# Altium PCB PCB1.PcbDoc (part 1 of 3)
Units mm, origin at the board's own origin, x right, y up, seen from the top; angles counter-clockwise.
Board outline 100 x 60 mm, 4 copper layers (Top Layer, GND, POWER, Bottom Layer), stack 1.592 mm thick; 134 components, 201 nets, 911 pads, 539 vias.
Unrouted connection lines stored in the file: 3.
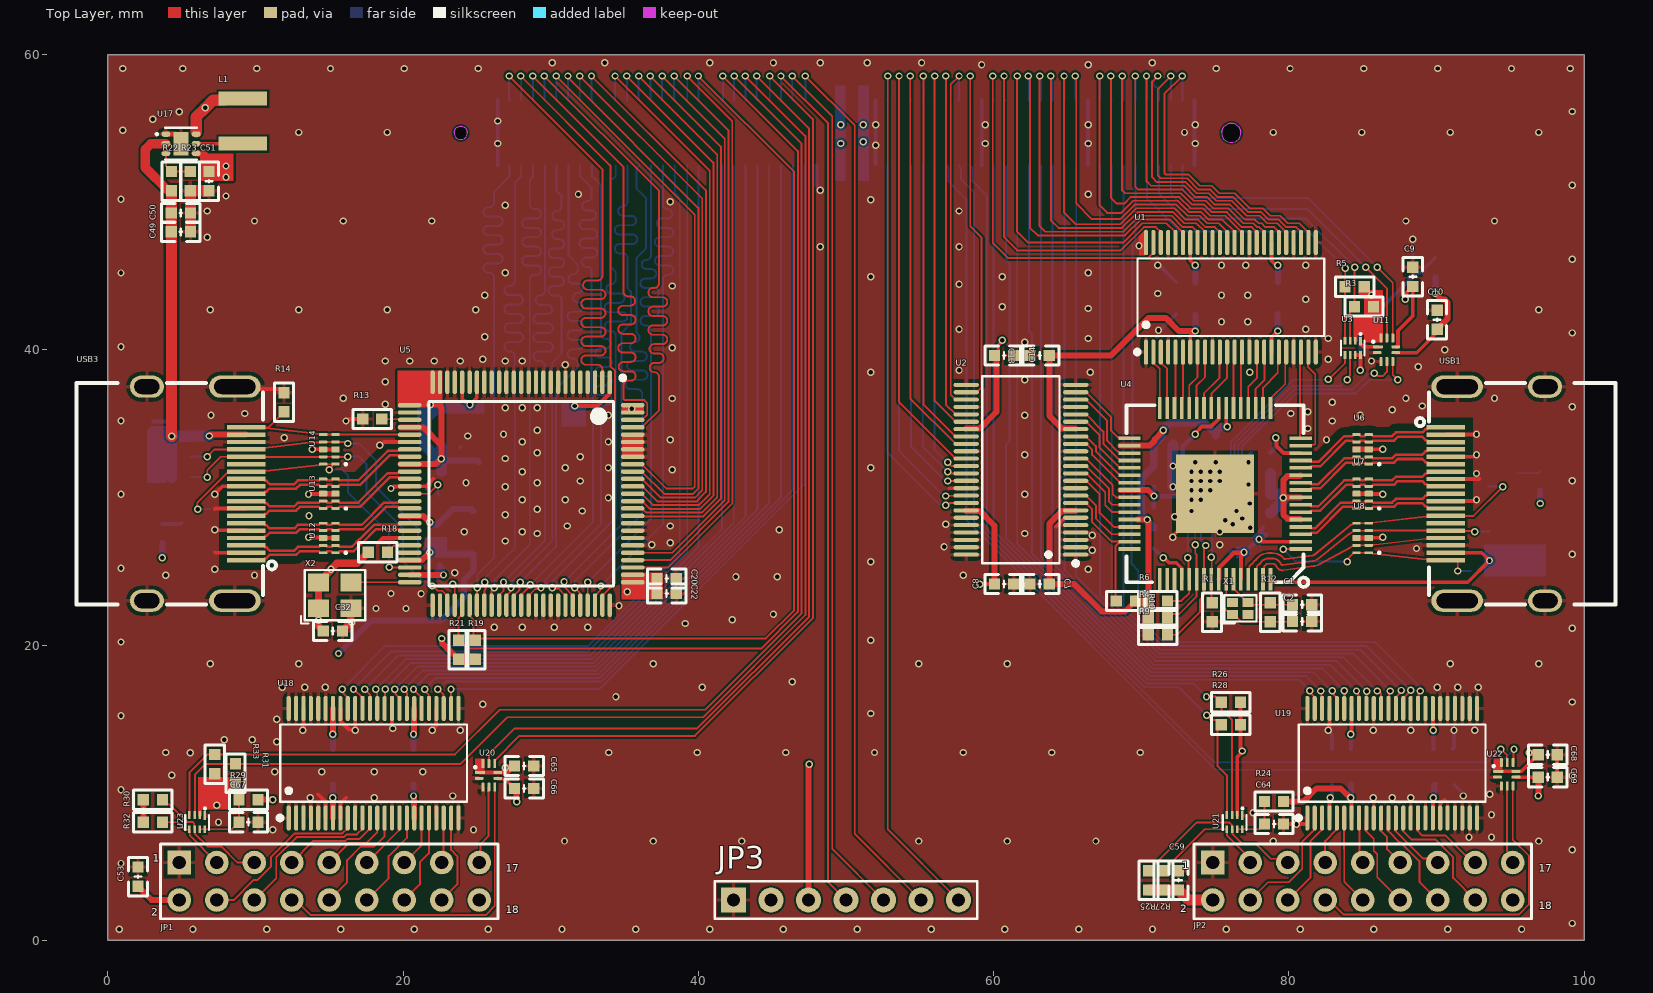
[diagram p0: Top Layer view]
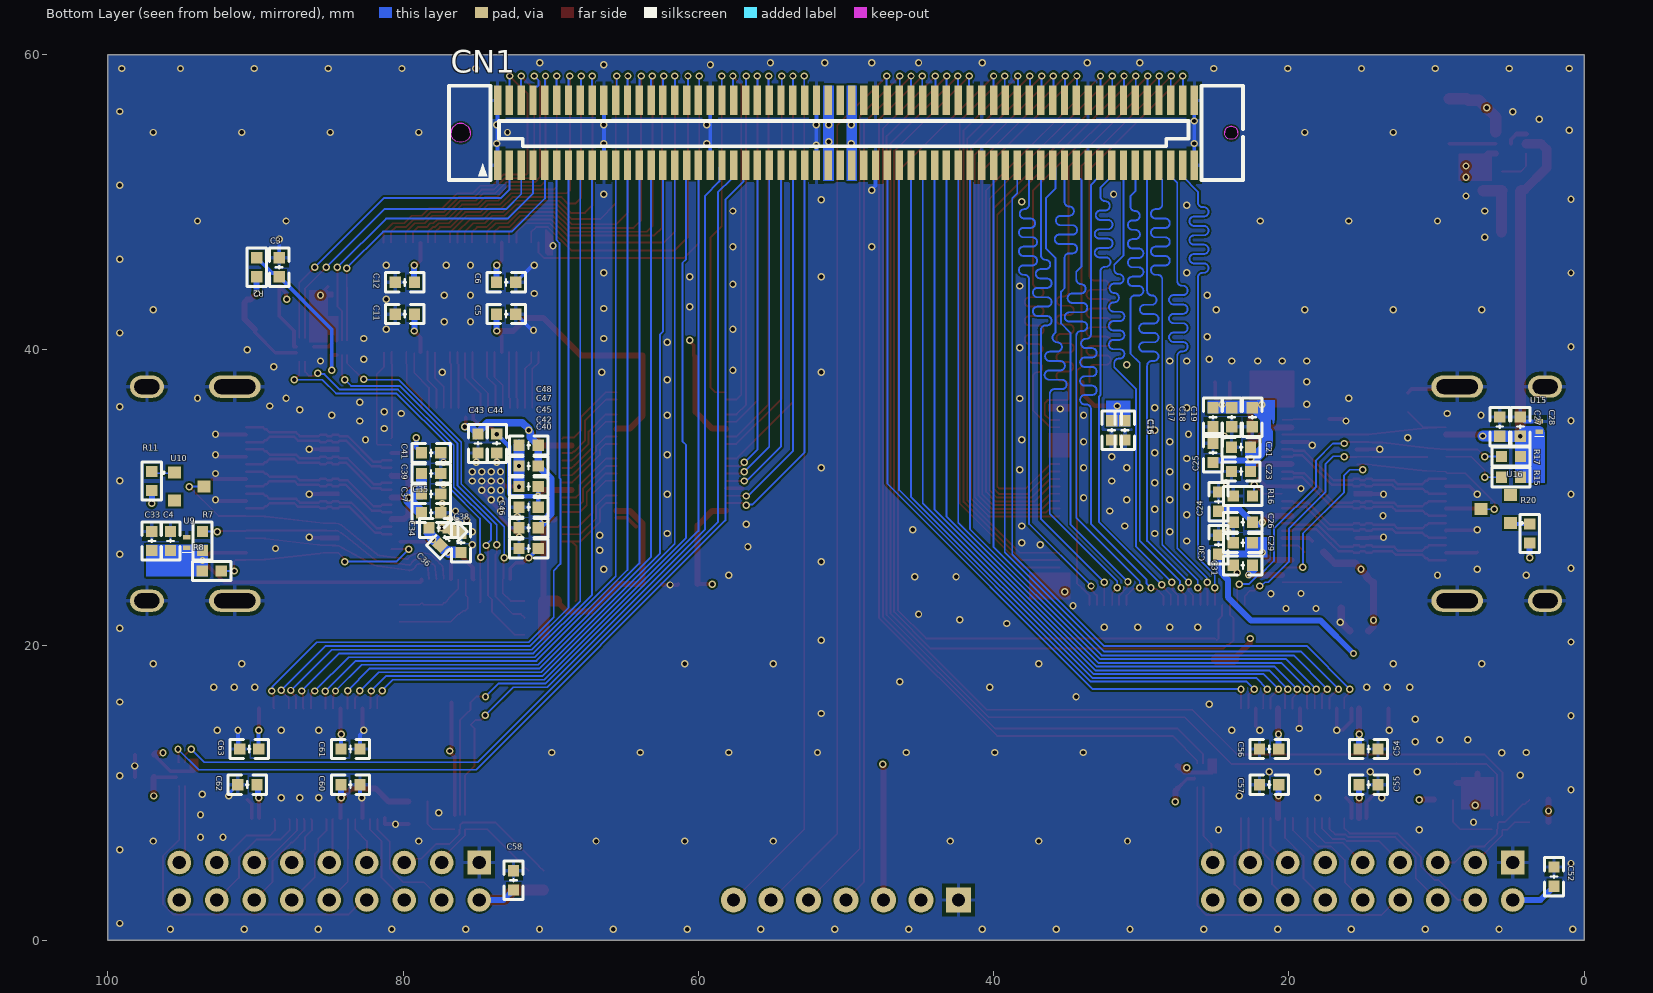
[diagram p1: Bottom Layer view, seen from below]
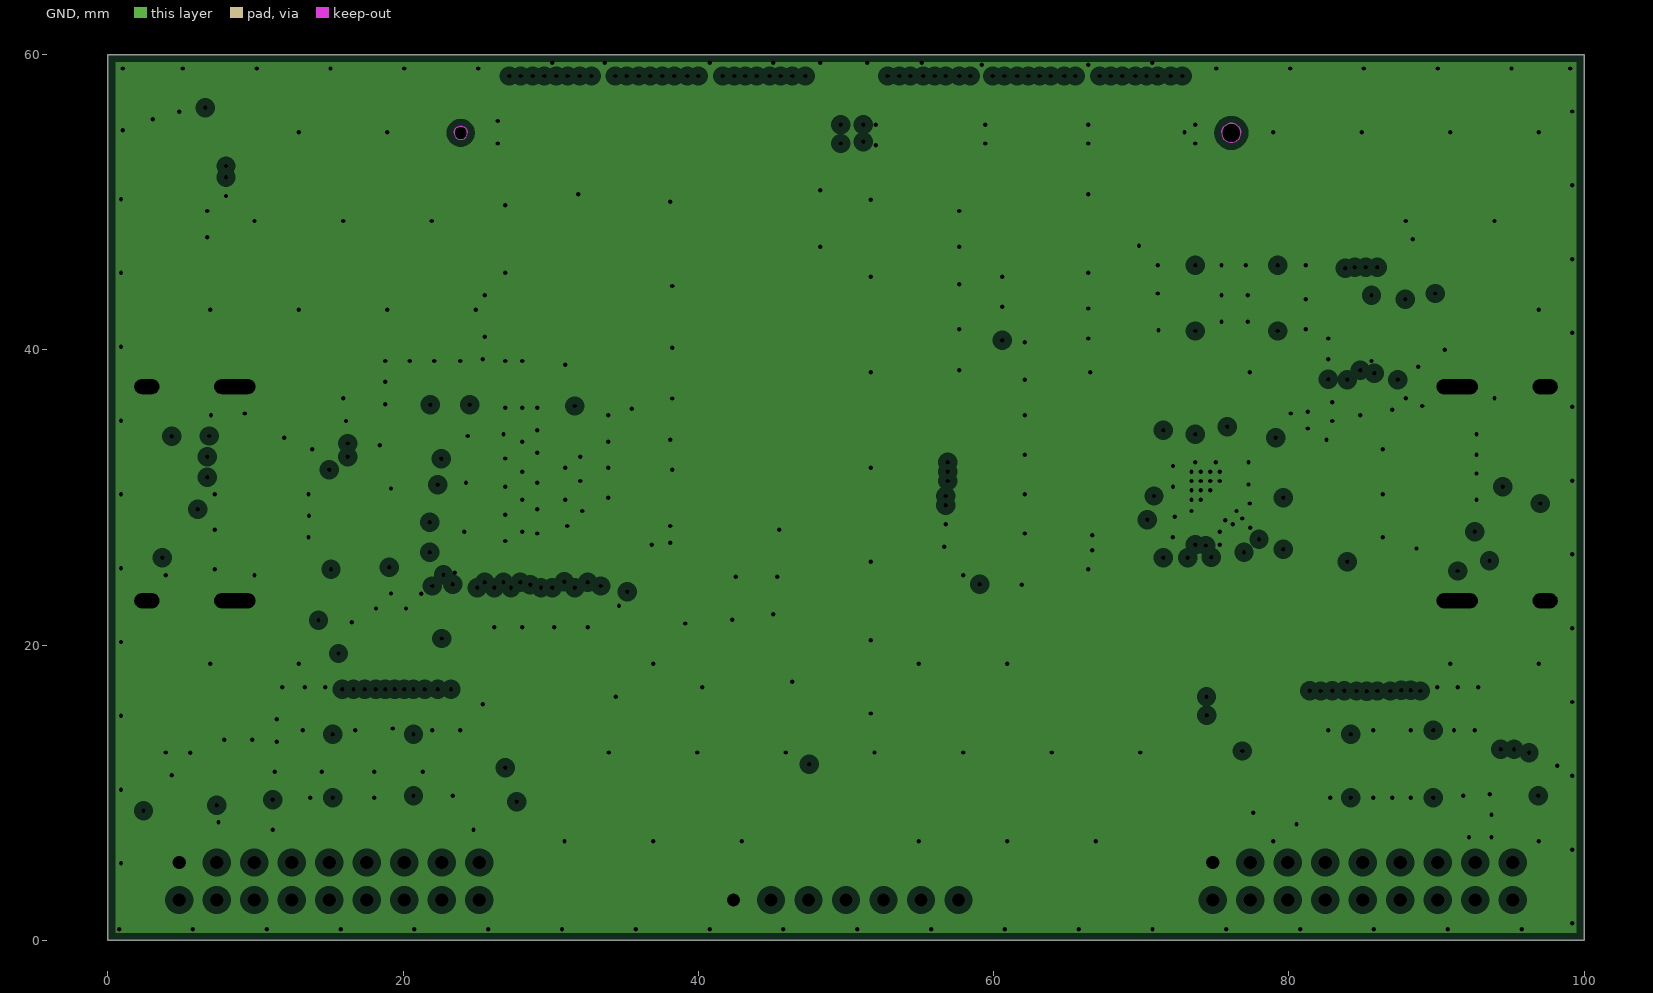
[diagram p2: GND, clearances drawn from the general rule]
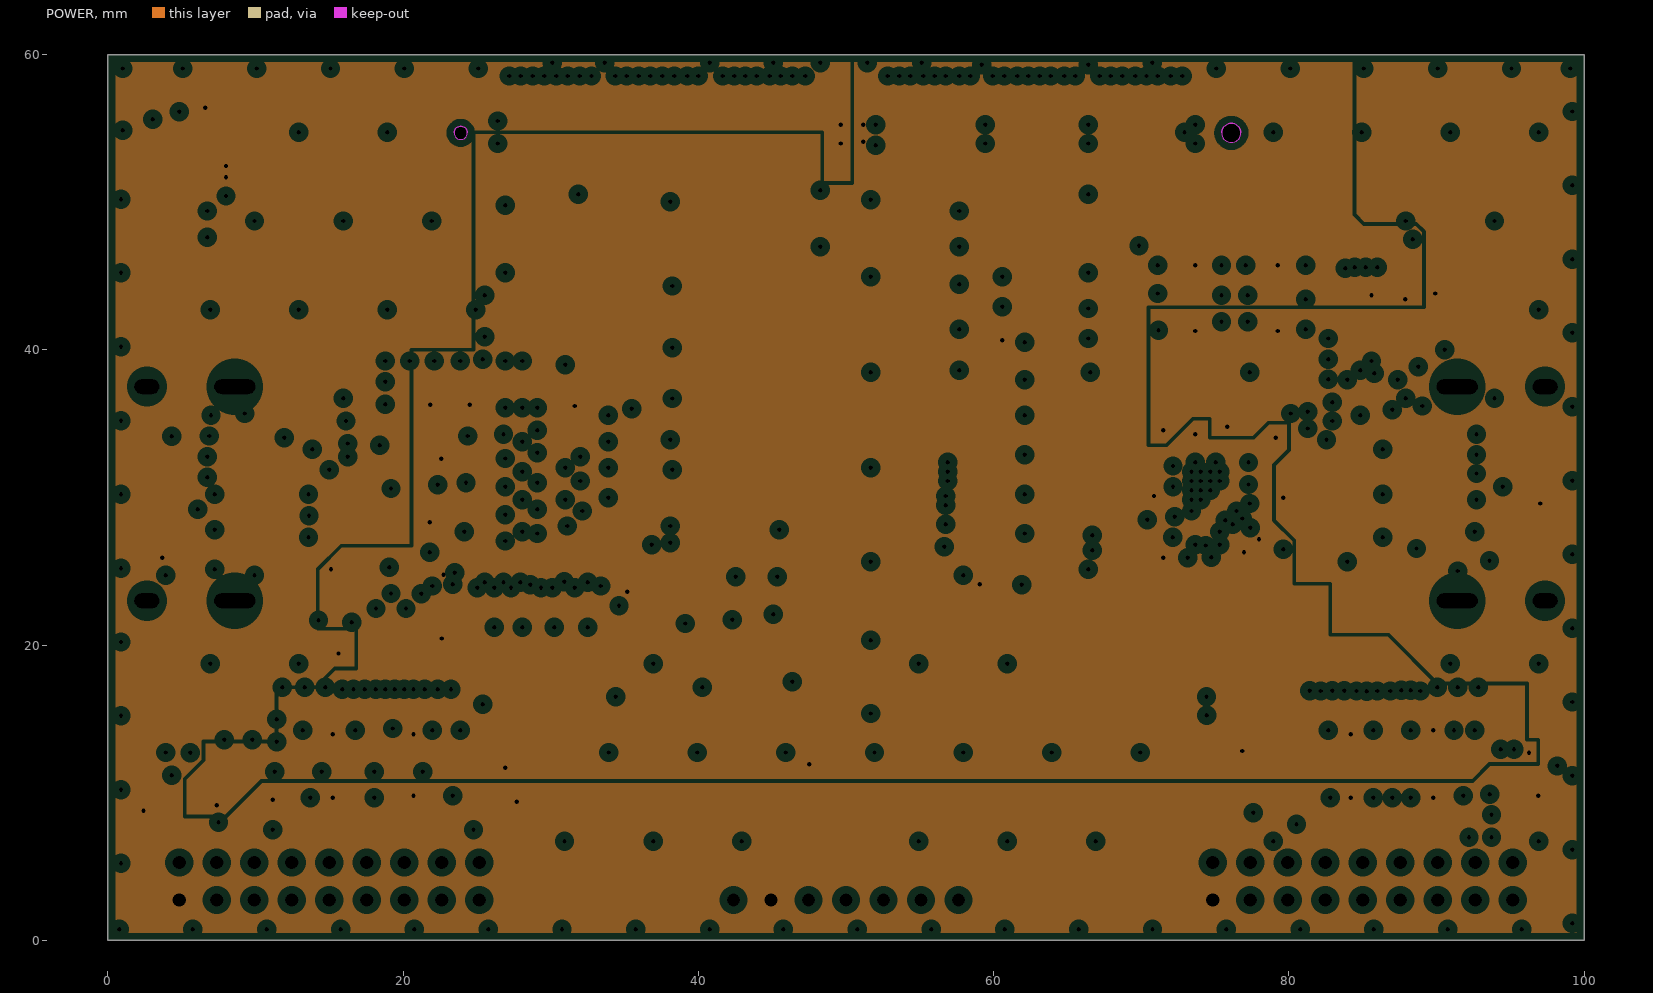
[diagram p3: POWER, clearances drawn from the general rule]

## Layer stack, top to bottom
Top Solder: solder mask 0.0102, Solder Resist, Dk 3.5
Top Layer: signal copper 0.0356
Dielectric 2: prepreg 0.2104, PP-022, Dk 4.6
GND: plane copper 0.0175, net GND
Dielectric 1: core 1.065, FR-4, Dk 4.6
POWER: plane copper 0.0175, net (Multiple Nets)
Dielectric 3: prepreg 0.2104, PP-022, Dk 4.6
Bottom Layer: signal copper 0.0356
Bottom Solder: solder mask 0.0102, Solder Resist, Dk 3.5

## Board outline
0,0 0,60 100,60 100,0

## Design rules (kind name [scope] priority, off if disabled: settings)
Clearance HDMI_TMDS_POLYGON_CLEARANCE [InDifferentialPairClass('HDMI_TMDS') vs InNamedPolygon('TOP_GND')] p1: gap=0.508 ignorepadtopadclearanceinfootprint=FALSE
Clearance [All] p2: gap=0.127 ignorepadtopadclearanceinfootprint=FALSE
DiffPairsRouting HDMI_TMDS_DIFF [InDifferentialPairClass('HDMI_TMDS')] p1: maxlimit=0.127 minlimit=0.127 mostfreqgap=0.127 toplayer_minwidth=0.17 toplayer_maxwidth=0.17 toplayer_prefwidth=0.17 bottomlayer_minwidth=0.17 bottomlayer_maxwidth=0.17 bottomlayer_prefwidth=0.17 impedanceprofiledriven=TRUE impedanceprofileid={8D1CDFE6-DA31-45BE-91C1-59907B42AE09} impedanceprofilevalue=100.000000 maxuncoupledlength=12.7
DiffPairsRouting [All] p2: maxlimit=2.54 minlimit=0.254 mostfreqgap=0.381 toplayer_minwidth=0.102 toplayer_maxwidth=0.381 toplayer_prefwidth=0.102 bottomlayer_minwidth=0.102 bottomlayer_maxwidth=0.381 bottomlayer_prefwidth=0.102 maxuncoupledlength=12.7
MatchedLengths CAM2_BUS_MATCH [InNetClass('CAM2_BUS')] p1: tolerance=10 checknetsindiffpair=FALSE checkdiffpairvsdiffpair=TRUE checkxsignals=TRUE checkothers=TRUE
MatchedLengths CAM1_BUS_MATCH [InNetClass('CAM1_BUS')] p2: tolerance=10 checknetsindiffpair=FALSE checkdiffpairvsdiffpair=TRUE checkxsignals=TRUE checkothers=TRUE
MatchedLengths ADV_RX_BUS_MATCH [InNetClass('ADV_RX_')] p3: tolerance=10 checknetsindiffpair=FALSE checkdiffpairvsdiffpair=TRUE checkxsignals=TRUE checkothers=TRUE
MatchedLengths ADV_TX_BUS_MATCH [InNetClass('ADV_TX_BUS')] p4: tolerance=5.08 checknetsindiffpair=FALSE checkdiffpairvsdiffpair=TRUE checkxsignals=TRUE checkothers=TRUE
PlaneClearance [All] p1: clearance=0.508
PlaneConnect [All] p1: planeconnectstyle=Direct reliefexpansion=0.508 reliefentries=4 reliefconductorwidth=0.254 reliefairgap=0.254
PolygonConnect [All] p1: thpad.connectstyle=Relief thpad.reliefconductorwidth=0.254 thpad.reliefentries=4 thpad.polygonreliefangle="90 Angle" thpad.airgapwidth=0.254 smdpad.connectstyle=Relief smdpad.reliefconductorwidth=0.254 smdpad.reliefentries=4 smdpad.polygonreliefangle="90 Angle" smdpad.airgapwidth=0.254 via.connectstyle=Direct via.reliefconductorwidth=0.254 via.reliefentries=4 via.polygonreliefangle="90 Angle" via.airgapwidth=0.254
RoutingVias [All] p1: holewidth=0.3 width=0.6 viastyle="Through Hole" minholewidth=0.2 minwidth=0.4 maxholewidth=0.3 maxwidth=0.5 useviatemplates=TRUE viatemplateguid#1={09E0C5F9-5BEE-49C6-81D4-A0BDA5712F45} viatemplatename#1=v50h30m0
SolderMaskExpansion [All] p1: expansion=0 istentingtop=FALSE
SupplyNets "Schematic Supply Nets_2" [InNet('3V3')] p1: voltage=0.000
SupplyNets "Schematic Supply Nets_1" [InNet('GND')] p2: voltage=0.000
SupplyNets "Schematic Supply Nets" [InNet('1V8')] p3: voltage=0.000
Width WIDTH_XTAL [InNetClass('XTAL')] p1: maxlimit=0.203 minlimit=0.127 preferedwidth=0.152
Width WIDTH_PWR [InNetClass('PWR')] p2: maxlimit=1.016 minlimit=0.254 preferedwidth=0.406
Width WIDTH_SIGNAL [All] p3: maxlimit=0.254 minlimit=0.102 preferedwidth=0.127
27 further rules are at their usual default settings.

## Classes and differential pairs
differential pair class HDMI_TMDS: D_HDMI_RX0 D_HDMI_RX1 D_HDMI_RX2 D_HDMI_RXC D_HDMI_TX0 D_HDMI_TX1 D_HDMI_TX2 D_HDMI_TXC
net class CAM2_BUS: CAM2_D0_1V8 CAM2_D1_1V8 CAM2_D2_1V8 CAM2_D3_1V8 CAM2_D4_1V8 CAM2_D5_1V8 CAM2_D6_1V8 CAM2_D7_1V8 CAM2_HREF_1V8 CAM2_PCLK_1V8 CAM2_VS_1v8
net class CAM1_BUS: CAM1_D0_1V8 CAM1_D1_1V8 CAM1_D2_1V8 CAM1_D3_1V8 CAM1_D4_1V8 CAM1_D5_1V8 CAM1_D6_1V8 CAM1_D7_1V8 CAM1_HREF_1V8 CAM1_PCLK_1V8 CAM1_VS_1V8
net class ADV_RX_BUS: ADV_RX_DE_1V8 ADV_RX_HS_1V8 ADV_RX_LLC_1V8 ADV_RX_P0_1V8 ADV_RX_P1_1V8 ADV_RX_P2_1V8 ADV_RX_P3_1V8 ADV_RX_P4_1V8 ADV_RX_P5_1V8 ADV_RX_P6_1V8 ADV_RX_P7_1V8 ADV_RX_P8_1V8 ADV_RX_P9_1V8 ADV_RX_P10_1V8 ADV_RX_P11_1V8 ADV_RX_P12_1V8 ADV_RX_P13_1V8 ADV_RX_P14_1V8 ADV_RX_P15_1V8 ADV_RX_P16_1V8 ADV_RX_P17_1V8 ADV_RX_P18_1V8 ADV_RX_P19_1V8 ADV_RX_P20_1V8 ADV_RX_P21_1V8 ADV_RX_P22_1V8 ADV_RX_P23_1V8 ADV_RX_VS_ALSB_1V8
net class ADV_TX_BUS: ADV_TX_D4 ADV_TX_D5 ADV_TX_D6 ADV_TX_D7 ADV_TX_D8 ADV_TX_D9 ADV_TX_D10 ADV_TX_D11 ADV_TX_D16 ADV_TX_D17 ADV_TX_D18 ADV_TX_D19 ADV_TX_D20 ADV_TX_D21 ADV_TX_D22 ADV_TX_D23 ADV_TX_D28 ADV_TX_D29 ADV_TX_D30 ADV_TX_D31 ADV_TX_D32 ADV_TX_D33 ADV_TX_D34 ADV_TX_D35 ADV_TX_DE ADV_TX_HS ADV_TX_PCLK ADV_TX_VS
net class PWR: 1V8 3V3 HDMI_TX_5V
component class 04_OV5640: C52 C53 C54 C55 C56 C57 C58 C59 C60 C61 C62 C63 C64 C65 C66 C67 C68 C69 JP1 JP2 MM R24 R25 R26 R27 R28 R29 R30 R31 R32 R33 U18 U19 U20 U21 U22 U23
component class 01_Power: C49 C50 C51 L1 R22 R23 U17
component class 05_FPGA_Interface: CN1 JP3
component class 03_ADV7511_HDMI_OUT: C15 C16 C17 C18 C19 C20 C21 C22 C23 C24 C25 C26 C27 C28 C29 C30 C31 C32 R13 R14 R15 R16 R17 R18 R19 R20 R21 U5 U12 U13 U14 U15 U16 USB3 X2
component class 02_ADV7611_HDMI_IN: C1 C2 C3 C4 C5 C6 C7 C8 C9 C10 C11 C12 C13 C14 C33 C34 C35 C36 C37 C38 C39 C40 C41 C42 C43 C44 C45 C46 C47 C48 R1 R2 R3 R4 R5 R6 R7 R8 R9 R10 R11 R12 U1 U2 U3 U4 U6 U7 U8 U9 U10 U11 USB1 X1
differential pair D_HDMI_TX0: +HDMI_TX0_P -HDMI_TX0_N
differential pair D_HDMI_TX1: +HDMI_TX1_P -HDMI_TX1_N
differential pair D_HDMI_TX2: +HDMI_TX2_P -HDMI_TX2_N
differential pair D_HDMI_TXC: +HDMI_TXC_P -HDMI_TXC_N
differential pair D_HDMI_RX0: +HDMI_RX0_P -HDMI_RX0_N
differential pair D_HDMI_RX1: +HDMI_RX1_P -HDMI_RX1_N
differential pair D_HDMI_RX2: +HDMI_RX2_P -HDMI_RX2_N
differential pair D_HDMI_RXC: +HDMI_RXC_P -HDMI_RXC_N

## Components (designator, comment, footprint, x,y, rotation, side; value= is the part's Value field where it differs from the comment)
C1 "104" "C 0603_L" 80.899,22.733 r180 top
C2 "104" "C 0603_L" 80.899,21.59 r180 top
C3 "104" "C 0603_L" 88.392,45.593 r90 bottom
C4 "24pF" "C 0603_L" 95.758,27.051 r90 bottom
C5 "24pF" "C 0603_L" 73.025,42.418 r0 bottom
C6 "24pF" "C 0603_L" 73.025,44.577 r180 bottom
C7 "24pF" "C 0603_L" 63.119,24.13 r0 top
C8 "24pF" "C 0603_L" 60.706,24.13 r0 top
C9 "24pF" "C 0603_L" 88.392,44.943 r270 top
C10 "24pF" "C 0603_L" 90.043,42.037 r270 top
C11 "24pF" "C 0603_L" 79.883,42.418 r180 bottom
C12 "24pF" "C 0603_L" 79.883,44.577 r0 bottom
C13 "24pF" "C 0603_L" 63.119,39.624 r0 top
C14 "24pF" "C 0603_L" 60.706,39.624 r0 top
C15 "100nF" "C 0603_L" 31.115,34.544 r90 bottom
C16 "10uF" "C 0603_L" 32.004,34.544 r90 bottom
C17 "100nF" "C 0603_L" 25.146,35.433 r270 bottom
C18 "100nF" "C 0603_L" 23.876,35.433 r270 bottom
C19 "100nF" "C 0603_L" 22.479,35.433 r270 bottom
C20 "100nF" "C 0603_L" 37.846,24.511 r180 top
C21 "100nF" "C 0603_L" 23.241,33.401 r0 bottom
C22 "100nF" "C 0603_L" 37.846,23.495 r180 top
C23 "100nF" "C 0603_L" 23.241,31.75 r0 bottom
C24 "100nF" "C 0603_L" 24.765,29.718 r90 bottom
C25 "100nF" "C 0603_L" 25.146,33.02 r90 bottom
C26 "100nF" "C 0603_L" 23.114,28.321 r0 bottom
C27 "1uF" "C 0603_L" 5.715,34.798 r90 bottom
C28 "100nF" "C 0603_L" 4.318,34.798 r90 bottom
C29 "1uF" "C 0603_L" 23.114,26.924 r0 bottom
C30 "100nF" "C 0603_L" 24.765,26.797 r90 bottom
C31 "100nF" "C 0603_L" 23.114,25.4 r0 bottom
C32 "100nF" "C 0603_L" 15.24,20.955 r0 top
C33 "24pF" "C 0603_L" 97.028,27.051 r90 bottom
C34 "24pF" "C 0603_L" 77.597,27.94 r0 bottom
C35 "24pF" "C 0603_L" 78.105,28.956 r0 bottom
C36 "24pF" "C 0603_L" 77.041,27.226 r135 bottom
C37 "24pF" "C 0603_L" 78.105,30.226 r0 bottom
C38 "24pF" "C 0603_L" 76.073,26.924 r90 bottom
C39 "24pF" "C 0603_L" 78.105,31.623 r0 bottom
C40 "24pF" "C 0603_L" 71.501,26.543 r0 bottom
C41 "24pF" "C 0603_L" 78.105,33.02 r0 bottom
C42 "24pF" "C 0603_L" 71.501,27.94 r0 bottom
C43 "24pF" "C 0603_L" 74.93,33.655 r90 bottom
C44 "24pF" "C 0603_L" 73.66,33.655 r90 bottom
C45 "24pF" "C 0603_L" 71.501,30.734 r0 bottom
C46 "24pF" "C 0603_L" 71.501,29.337 r0 bottom
C47 "24pF" "C 0603_L" 71.501,32.131 r0 bottom
C48 "24pF" "C 0603_L" 71.501,33.528 r0 bottom
C49 "10uF" "C 0603_L" 4.938,47.995 r180 top
C50 "10uF" "C 0603_L" 4.938,49.265 r180 top
C51 "10uF" "C 0603_L" 6.858,51.424 r90 top
C52 "24pF" "C 0603_L" 2.032,4.318 r90 bottom
C53 "24pF" "C 0603_L" 2.032,4.318 r270 top
C54 "24pF" "C 0603_L" 14.605,12.954 r180 bottom
C55 "24pF" "C 0603_L" 14.605,10.541 r180 bottom
C56 "24pF" "C 0603_L" 21.336,12.954 r0 bottom
C57 "24pF" "C 0603_L" 21.336,10.541 r0 bottom
C58 "24pF" "C 0603_L" 72.517,4.064 r90 bottom
C59 "24pF" "C 0603_L" 72.517,4.064 r270 top
C60 "24pF" "C 0603_L" 83.566,10.541 r180 bottom
C61 "24pF" "C 0603_L" 83.566,12.954 r180 bottom
C62 "24pF" "C 0603_L" 90.551,10.541 r180 bottom
C63 "24pF" "C 0603_L" 90.424,12.954 r0 bottom
C64 "24pF" "C 0603_L" 78.994,7.874 r180 top
C65 "24pF" "C 0603_L" 28.194,11.811 r0 top
C66 "24pF" "C 0603_L" 28.194,10.287 r0 top
C67 "24pF" "C 0603_L" 9.525,8.001 r180 top
C68 "24pF" "C 0603_L" 97.536,12.573 r0 top
C69 "24pF" "C 0603_L" 97.536,11.049 r0 top
CN1 "xdb612-120p-cor" CONN-SMD_120P-P0.80_THD0812F-120BV-GF 50,54.696 r180 bottom locked
JP1 "Header 9X2" HDR2.54-LI-2x9P 15,4 r0 top
JP2 "Header 9X2" HDR2.54-LI-2x9P 85,4 r0 top
JP3 "HDR-1X7" HDR2.54-LI-7P 50,2.73 r0 top
L1 "2.2uH" L 9.144,57.012 r270 top
R1 "4.7K" "R 0603_L" 74.803,22.225 r270 top
R2 "1K" "R 0603_L" 89.916,45.593 r270 bottom
R3 "1K" "R 0603_L" 85.09,42.926 r0 top
R4 "1K" "R 0603_L" 71.12,21.844 r0 top
R5 "1K" "R 0603_L" 84.455,44.267 r0 top
R6 "1K" "R 0603_L" 71.12,22.987 r0 top
R7 "4.7K" "R 0603_L" 93.599,27.051 r270 bottom
R8 "4.7K" "R 0603_L" 92.964,25.019 r180 bottom
R9 "4.7K" "R 0603_L" 71.12,20.701 r180 top
R10 "4.7K" "R 0603_L" 68.961,22.987 r180 top
R11 "4.7K" "R 0603_L" 97.028,31.115 r270 bottom
R12 "4.7K" "R 0603_L" 78.74,22.225 r90 top
R13 "887R" "R 0603_L" 17.907,35.306 r0 top
R14 "10K" "R 0603_L" 11.938,36.449 r270 top
R15 "2K" "R 0603_L" 4.953,31.369 r0 bottom
R16 "2K" "R 0603_L" 23.114,30.099 r180 bottom
R17 "2K" "R 0603_L" 4.953,32.766 r0 bottom
R18 "2K" "R 0603_L" 18.288,26.289 r0 top
R19 "2K" "R 0603_L" 24.892,19.685 r270 top
R20 "27K" "R 0603_L" 3.683,27.559 r270 bottom
R21 "2K" "R 0603_L" 23.749,19.685 r270 top
R22 "1M" "R 0603_L" 4.303,51.424 r90 top
R23 "249K" "R 0603_L" 5.573,51.424 r90 top
R24 "4.7K" "R 0603_L" 78.994,9.398 r0 top
R25 "4.7K" "R 0603_L" 70.485,4.064 r270 top
R26 "4.7K" "R 0603_L" 76.073,16.129 r180 top
R27 "4.7K" "R 0603_L" 71.501,4.064 r270 top
R28 "4.7K" "R 0603_L" 76.073,14.605 r180 top
R29 "4.7K" "R 0603_L" 9.525,9.525 r0 top
R30 "4.7K" "R 0603_L" 3.048,9.525 r180 top
R31 "4.7K" "R 0603_L" 8.645,11.316 r90 top
R32 "4.7K" "R 0603_L" 3.048,8.001 r180 top
R33 "4.7K" "R 0603_L" 7.239,11.938 r90 top
U1 "sn74avc16t245dggr" TSSOP-48_L12.6-W6.2-P0.50-LS8.1-BL 76.073,43.561 r0 top locked
U2 "sn74avc16t245dggr" TSSOP-48_L12.6-W6.2-P0.50-LS8.1-BL 61.849,31.877 r90 top
U3 "pca9306dqer" X2SON-8_L1.4-W1.0-P0.35-BL 84.328,40.132 r180 top
U4 "adv7611bswz-rl" LQFP-64_L10.0-W10.0-P0.50-LS12.0-TL-EP5.3 75,30.254 r180 top locked
U5 "adv7511kstz" LQFP-100_L14.0-W14.0-P0.50-LS16.0-BL 28,30.254 r180 top locked
U6 "TPD4E05U06" TPD4E05U06DQAR 85,33.254 r90 top locked
U7 "TPD4E05U06" TPD4E05U06DQAR 85,30.254 r90 top locked
U8 "TPD4E05U06" TPD4E05U06DQAR 85,27.254 r90 top locked
U9 "TPD1E05U06" TPD1E05U06 94.666,26.956 r90 bottom
U10 "BAS40LT1G" BAS40LT1G 94.488,30.734 r270 bottom
U11 "SN74AXC2T245" SN74AXC2T245 86.614,40.005 r0 top
U12 "TPD4E05U06" TPD4E05U06DQAR 15,27.254 r90 top locked
U13 "TPD4E05U06" TPD4E05U06DQAR 15,30.254 r90 top locked
U14 "TPD4E05U06" TPD4E05U06DQAR 15,33.254 r90 top locked
U15 "TPD1E05U06" TPD1E05U06 3.048,34.798 r90 bottom
U16 "BAS40LT1G" BAS40LT1G 5.985,29.21 r90 bottom
U17 "tps61099drvr" WSON-6_L2.0-W2.0-P0.65-TL-EP 4.953,53.964 r0 top
U18 "sn74avc16t245dggr" TSSOP-48_L12.6-W6.2-P0.50-LS8.1-BL 18,12 r0 top locked
U19 "sn74avc16t245dggr" TSSOP-48_L12.6-W6.2-P0.50-LS8.1-BL 87,12 r0 top locked
U20 "SN74AXC2T245" SN74AXC2T245 25.781,11.176 r0 top
U21 "pca9306dqer" X2SON-8_L1.4-W1.0-P0.35-BL 76.327,8 r180 top
U22 "SN74AXC2T245" SN74AXC2T245 94.767,11.249 r0 top
U23 "pca9306dqer" X2SON-8_L1.4-W1.0-P0.35-BL 6.048,8 r180 top
USB1 "hdmi-001s" HDMI-SMD_HDMI-001S 94,30.254 r90 top locked
USB3 "hdmi-001s" HDMI-SMD_HDMI-001S 6,30.254 r270 top locked
X1 "26M" "OSC 1612-4P" 76.708,22.479 r0 top
X2 "ot322512mjba4sl" OSC-SMD_4P-L3.2-W2.5-BL 15.367,23.368 r0 top value=12MHz

## Footprints (in the part's own frame and the unit in brackets; to place one, negate y for a bottom-side part, rotate by r counter-clockwise, add the part's x,y. Pads: shape width x height; smd on the part's side, far side on the other; paste and mask are expansions set on the pad)
BAS40LT1G [mm]
  rect 0.8x0.9 smd: 1(-0.95,-1) 2(0.95,-1) 3(0,1)
  silkscreen extent -1.02,-1.83 -0.88,-1.68
"C 0603_L" [mil] "无极性贴片电容                                       淘宝ID:黄晶宝石"
  rect 30x30 smd: 1(-25.59,0) 2(25.59,0)
  silkscreen extent -51,-26 51,26, body extent -31,-16 31,16, height 32
CONN-SMD_120P-P0.80_THD0812F-120BV-GF [mm]
  rect 0.5x1.999 smd paste+0 mask+0.051: 1(-23.599,-2.2) 2(-23.599,2.2) 3(-22.799,-2.2) 4(-22.799,2.2) 5(-21.999,-2.2) 6(-21.999,2.2) 7(-21.199,-2.2) 8(-21.199,2.2) 9(-20.399,-2.2) 10(-20.399,2.2) 11(-19.599,-2.2) 12(-19.599,2.2) 13(-18.799,-2.2) 14(-18.799,2.2) 15(-17.998,-2.2) 16(-17.998,2.2) 17(-17.201,-2.2) 18(-17.201,2.2) 19(-16.401,-2.2) 20(-16.401,2.2) 21(-15.601,-2.2) 22(-15.601,2.2) 23(-14.801,-2.2) 24(-14.801,2.2) 25(-14,-2.2) 26(-14,2.2) 27(-13.2,-2.2) 28(-13.2,2.2) 29(-12.4,-2.2) 30(-12.4,2.2) 31(-11.6,-2.2) 32(-11.6,2.2) 33(-10.8,-2.2) 34(-10.8,2.2) 35(-10,-2.2) 36(-10,2.2) 37(-9.2,-2.2) 38(-9.2,2.2) 39(-8.4,-2.2) 40(-8.4,2.2) 41(-7.6,-2.2) 42(-7.6,2.2) 43(-6.8,-2.2) 44(-6.8,2.2) 45(-5.999,-2.2) 46(-5.999,2.2) 47(-5.199,-2.2) 48(-5.199,2.2) 49(-4.399,-2.2) 50(-4.399,2.2) 51(-3.599,-2.2) 52(-3.599,2.2) 53(-2.799,-2.2) 54(-2.799,2.2) 55(-1.999,-2.2) 56(-1.999,2.2) 57(-1.199,-2.2) 58(-1.199,2.2) 59(-0.399,-2.2) 60(-0.399,2.2) 61(0.401,-2.2) 62(0.401,2.2) 63(1.201,-2.2) 64(1.201,2.2) 65(2.002,-2.2) 66(2.002,2.2) 67(2.799,-2.2) 68(2.799,2.2) 69(3.599,-2.2) 70(3.599,2.2) 71(4.399,-2.2) 72(4.399,2.2) 73(5.199,-2.2) 74(5.199,2.2) 75(5.999,-2.2) 76(5.999,2.2) 77(6.8,-2.2) 78(6.8,2.2) 79(7.6,-2.2) 80(7.6,2.2) 81(8.4,-2.2) 82(8.4,2.2) 83(9.2,-2.2) 84(9.2,2.2) 85(10,-2.2) 86(10,2.2) 87(10.8,-2.2) 88(10.8,2.2) 89(11.6,-2.2) 90(11.6,2.2) 91(12.4,-2.2) 92(12.4,2.2) 93(13.2,-2.2) 94(13.2,2.2) 95(14,-2.2) 96(14,2.2) 97(14.801,-2.2) 98(14.801,2.2) 99(15.601,-2.2) 100(15.601,2.2) 101(16.401,-2.2) 102(16.401,2.2) 103(17.201,-2.2) 104(17.201,2.2) 105(18.001,-2.2) 106(18.001,2.2) 107(18.801,-2.2) 108(18.801,2.2) 109(19.601,-2.2) 110(19.601,2.2) 111(20.401,-2.2) 112(20.401,2.2) 113(21.201,-2.2) 114(21.201,2.2) 115(22.001,-2.2) 116(22.001,2.2) 117(22.802,-2.2) 118(22.802,2.2) 119(23.599,-2.2) 120(23.599,2.2)
  Keep-Out Layer board cut-out: -25.451,0 -25.458,-0.114 -25.489,-0.224 -25.537,-0.325 -25.601,-0.419 -25.682,-0.498 -25.776,-0.564 -25.878,-0.612 -25.987,-0.64 -26.098,-0.65 -26.213,-0.64 -26.322,-0.612 -26.424,-0.564 -26.518,-0.498 -26.599,-0.419 -26.662,-0.325 -26.711,-0.224 -26.741,-0.114 -26.749,0 -26.741,0.112 -26.711,0.221 -26.662,0.325 -26.599,0.417 -26.518,0.498 -26.424,0.561 -26.322,0.61 -26.213,0.64 -26.098,0.65 -25.987,0.64 -25.878,0.61 -25.776,0.561 -25.682,0.498 -25.601,0.417 -25.537,0.325 -25.489,0.221 -25.458,0.112 -25.451,0
  Keep-Out Layer board cut-out: 26.551,0 26.54,-0.094 26.513,-0.183 26.464,-0.264 26.401,-0.335 26.325,-0.391 26.238,-0.429 26.147,-0.447 26.053,-0.447 25.961,-0.429 25.875,-0.391 25.799,-0.335 25.735,-0.264 25.69,-0.183 25.659,-0.094 25.651,0 25.659,0.094 25.69,0.183 25.735,0.264 25.799,0.335 25.875,0.389 25.961,0.427 26.053,0.447 26.147,0.447 26.238,0.427 26.325,0.389 26.401,0.335 26.464,0.264 26.513,0.183 26.54,0.094 26.551,0
  Keep-Out Layer region: -25.451,0 -25.458,-0.114 -25.489,-0.224 -25.537,-0.325 -25.601,-0.419 -25.682,-0.498 -25.776,-0.564 -25.878,-0.612 -25.987,-0.64 -26.098,-0.65 -26.213,-0.64 -26.322,-0.612 -26.424,-0.564 -26.518,-0.498 -26.599,-0.419 -26.662,-0.325 -26.711,-0.224 -26.741,-0.114 -26.749,0 -26.741,0.112 -26.711,0.221 -26.662,0.325 -26.599,0.417 -26.518,0.498 -26.424,0.561 -26.322,0.61 -26.213,0.64 -26.098,0.65 -25.987,0.64 -25.878,0.61 -25.776,0.561 -25.682,0.498 -25.601,0.417 -25.537,0.325 -25.489,0.221 -25.458,0.112 -25.451,0
  Keep-Out Layer region: -25.451,0 -25.458,-0.114 -25.489,-0.224 -25.537,-0.325 -25.601,-0.419 -25.682,-0.498 -25.776,-0.564 -25.878,-0.612 -25.987,-0.64 -26.098,-0.65 -26.213,-0.64 -26.322,-0.612 -26.424,-0.564 -26.518,-0.498 -26.599,-0.419 -26.662,-0.325 -26.711,-0.224 -26.741,-0.114 -26.749,0 -26.741,0.112 -26.711,0.221 -26.662,0.325 -26.599,0.417 -26.518,0.498 -26.424,0.561 -26.322,0.61 -26.213,0.64 -26.098,0.65 -25.987,0.64 -25.878,0.61 -25.776,0.561 -25.682,0.498 -25.601,0.417 -25.537,0.325 -25.489,0.221 -25.458,0.112 -25.451,0
  Keep-Out Layer region: 26.551,0 26.54,-0.094 26.513,-0.183 26.464,-0.264 26.401,-0.335 26.325,-0.391 26.238,-0.429 26.147,-0.447 26.053,-0.447 25.961,-0.429 25.875,-0.391 25.799,-0.335 25.735,-0.264 25.69,-0.183 25.659,-0.094 25.651,0 25.659,0.094 25.69,0.183 25.735,0.264 25.799,0.335 25.875,0.389 25.961,0.427 26.053,0.447 26.147,0.447 26.238,0.427 26.325,0.389 26.401,0.335 26.464,0.264 26.513,0.183 26.54,0.094 26.551,0
  Keep-Out Layer region: 26.551,0 26.54,-0.094 26.513,-0.183 26.464,-0.264 26.401,-0.335 26.325,-0.391 26.238,-0.429 26.147,-0.447 26.053,-0.447 25.961,-0.429 25.875,-0.391 25.799,-0.335 25.735,-0.264 25.69,-0.183 25.659,-0.094 25.651,0 25.659,0.094 25.69,0.183 25.735,0.264 25.799,0.335 25.875,0.389 25.961,0.427 26.053,0.447 26.147,0.447 26.238,0.427 26.325,0.389 26.401,0.335 26.464,0.264 26.513,0.183 26.54,0.094 26.551,0
  Keep-Out Layer lines w0.003: 26.551,0 26.54,-0.094 26.513,-0.183 26.464,-0.264 26.401,-0.335 26.325,-0.391 26.238,-0.429 26.147,-0.447 26.053,-0.447 25.961,-0.429 25.875,-0.391 25.799,-0.335 25.735,-0.264 25.69,-0.183 25.659,-0.094 25.651,0 25.659,0.094 25.69,0.183 25.735,0.264 25.799,0.335 25.875,0.389 25.961,0.427 26.053,0.447 26.147,0.447 26.238,0.427 26.325,0.389 26.401,0.335 26.464,0.264 26.513,0.183 26.54,0.094 26.551,0 ; -25.451,0 -25.458,-0.114 -25.489,-0.224 -25.537,-0.325 -25.601,-0.419 -25.682,-0.498 -25.776,-0.564 -25.878,-0.612 -25.987,-0.64 -26.098,-0.65 -26.213,-0.64 -26.322,-0.612 -26.424,-0.564 -26.518,-0.498 -26.599,-0.419 -26.662,-0.325 -26.711,-0.224 -26.741,-0.114 -26.749,0 -26.741,0.112 -26.711,0.221 -26.662,0.325 -26.599,0.417 -26.518,0.498 -26.424,0.561 -26.322,0.61 -26.213,0.64 -26.098,0.65 -25.987,0.64 -25.878,0.61 -25.776,0.561 -25.682,0.498 -25.601,0.417 -25.537,0.325 -25.489,0.221 -25.458,0.112 -25.451,0
  silkscreen extent -26.9,-3.2 26.9,3.2
HDMI-SMD_HDMI-001S [mil]
  rect 11.8x102.4 smd paste-3937 mask+2: 1(177.1,132.3) 2(157.4,132.3) 3(137.7,132.3) 4(118.1,132.3) 5(98.4,132.3) 6(78.7,132.3) 7(59,132.3) 8(39.3,132.3) 9(19.6,132.3) 10(0,132.3) 11(-19.7,132.3) 12(-39.4,132.3) 13(-59.1,132.3) 14(-78.8,132.3) 15(-98.5,132.3) 16(-118.2,132.3) 17(-137.8,132.3) 18(-157.5,132.3) 19(-177.2,132.3)
  oval 59.1x137.8 hole 39.4 slot 110.2 at 90 deg: 20(-285.5,102.4) 21(285.4,102.4)
  oval 59.1x90.6 hole 39.4 slot 66.9 at 90 deg: 22(-285.5,-132.2) 23(285.4,-132.2)
  silkscreen extent -295,-320 295,212
HDR2.54-LI-2x9P [mm] "双排排针，9x2脚 淘宝ID:黄晶宝石   店铺网址:https://shop463601444.taobao.com"
  rect 1.6x1.6 hole 0.9: 1(-10.16,1.27)
  round 1.6 hole 0.9: 2(-10.16,-1.27) 3(-7.62,1.27) 4(-7.62,-1.27) 5(-5.08,1.27) 6(-5.08,-1.27) 7(-2.54,1.27) 8(-2.54,-1.27) 9(0,1.27) 10(0,-1.27) 11(2.54,1.27) 12(2.54,-1.27) 13(5.08,1.27) 14(5.08,-1.27) 15(7.62,1.27) 16(7.62,-1.27) 17(10.16,1.27) 18(10.16,-1.27)
  silkscreen extent -11.43,-2.54 11.43,2.54, body extent -11.43,-2.54 11.43,2.54, height 8.5
HDR2.54-LI-7P [mm] "排针，8脚"
  rect 1.7x1.7 hole 0.9: 1(-7.62,0)
  round 1.7 hole 0.9: 2(-5.08,0) 3(-2.54,0) 4(0,0) 5(2.54,0) 6(5.08,0) 7(7.62,0)
  silkscreen extent -8.89,-1.27 8.89,1.27, body extent -8.89,-1.27 8.89,1.27, height 8.5
L [mm] "电感"
  rect 0.95x3.3 smd: 1(0,0) 2(3.05,0)
LQFP-64_L10.0-W10.0-P0.50-LS12.0-TL-EP5.3 [mil]
  rect 59.1x9.8 smd: 1(-228.4,147.6) 2(-228.4,127.9) 3(-228.4,108.2) 4(-228.4,88.6) 5(-228.4,68.9) 6(-228.4,49.2) 7(-228.4,29.5) 8(-228.4,9.8) 9(-228.4,-9.9) 10(-228.4,-29.6) 11(-228.4,-49.2) 12(-228.4,-68.9) 13(-228.4,-88.6) 14(-228.4,-108.3) 15(-228.4,-128) 16(-228.4,-147.7) 33(228.3,-147.7) 34(228.3,-128) 35(228.3,-108.3) 36(228.3,-88.6) 37(228.3,-68.9) 38(228.3,-49.2) 39(228.3,-29.6) 40(228.3,-9.9) 41(228.3,9.8) 42(228.3,29.5) 43(228.3,49.2) 44(228.3,68.9) 45(228.3,88.6) 46(228.3,108.2) 47(228.3,127.9) 48(228.3,147.6)
  rect 9.8x59.1 smd: 17(-147.7,-228.4) 18(-128,-228.4) 19(-108.3,-228.4) 20(-88.6,-228.4) 21(-68.9,-228.4) 22(-49.2,-228.4) 23(-29.6,-228.4) 24(-9.9,-228.4) 25(9.8,-228.4) 26(29.5,-228.4) 27(49.2,-228.4) 28(68.9,-228.4) 29(88.6,-228.4) 30(108.2,-228.4) 31(127.9,-228.4) 32(147.6,-228.4) 49(147.6,228.3) 50(127.9,228.3) 51(108.2,228.3) 52(88.6,228.3) 53(68.9,228.3) 54(49.2,228.3) 55(29.5,228.3) 56(9.8,228.3) 57(-9.9,228.3) 58(-29.6,228.3) 59(-49.2,228.3) 60(-68.9,228.3) 61(-88.6,228.3) 62(-108.3,228.3) 63(-128,228.3) 64(-147.7,228.3)
  rect 208.7x208.7 smd: 65(0,0)
  silkscreen extent -249,-236 236,249
LQFP-100_L14.0-W14.0-P0.50-LS16.0-BL [mil]
  oval 11.8x63 smd: 1(-236.2,-297.3) 2(-216.5,-297.3) 3(-196.8,-297.3) 4(-177.1,-297.3) 5(-157.4,-297.3) 6(-137.8,-297.3) 7(-118.1,-297.3) 8(-98.4,-297.3) 9(-78.7,-297.3) 10(-59,-297.3) 11(-39.3,-297.3) 12(-19.6,-297.3) 13(0,-297.3) 14(19.7,-297.3) 15(39.4,-297.3) 16(59.1,-297.3) 17(78.8,-297.3) 18(98.5,-297.3) 19(118.1,-297.3) 20(137.8,-297.3) 21(157.5,-297.3) 22(177.2,-297.3) 23(196.9,-297.3) 24(216.6,-297.3) 25(236.3,-297.3) 51(236.3,297.2) 52(216.6,297.2) 53(196.9,297.2) 54(177.2,297.2) 55(157.5,297.2) 56(137.8,297.2) 57(118.1,297.2) 58(98.5,297.2) 59(78.8,297.2) 60(59.1,297.2) 61(39.4,297.2) 62(19.7,297.2) 63(0,297.2) 64(-19.6,297.2) 65(-39.3,297.2) 66(-59,297.2) 67(-78.7,297.2) 68(-98.4,297.2) 69(-118.1,297.2) 70(-137.8,297.2) 71(-157.4,297.2) 72(-177.1,297.2) 73(-196.8,297.2) 74(-216.5,297.2) 75(-236.2,297.2)
  oval 63x11.8 smd: 26(297.3,-236.2) 27(297.3,-216.6) 28(297.3,-196.9) 29(297.3,-177.2) 30(297.3,-157.5) 31(297.3,-137.8) 32(297.3,-118.1) 33(297.3,-98.5) 34(297.3,-78.8) 35(297.3,-59.1) 36(297.3,-39.4) 37(297.3,-19.7) 38(297.3,0) 39(297.3,19.7) 40(297.3,39.3) 41(297.3,59) 42(297.3,78.7) 43(297.3,98.4) 44(297.3,118.1) 45(297.3,137.8) 46(297.3,157.4) 47(297.3,177.1) 48(297.3,196.8) 49(297.3,216.5) 50(297.3,236.2) 76(-297.2,236.2) 77(-297.2,216.5) 78(-297.2,196.8) 79(-297.2,177.1) 80(-297.2,157.4) 81(-297.2,137.8) 82(-297.2,118.1) 83(-297.2,98.4) 84(-297.2,78.7) 85(-297.2,59) 86(-297.2,39.3) 87(-297.2,19.7) 88(-297.2,0) 89(-297.2,-19.7) 90(-297.2,-39.4) 91(-297.2,-59.1) 92(-297.2,-78.8) 93(-297.2,-98.5) 94(-297.2,-118.1) 95(-297.2,-137.8) 96(-297.2,-157.5) 97(-297.2,-177.2) 98(-297.2,-196.9) 99(-297.2,-216.6) 100(-297.2,-236.2)
  silkscreen extent -277,-315 246,246
"OSC 1612-4P" [mm] "1.6*1.2*0.35mm（长宽高）                    淘宝ID:黄晶宝石"
  rect 0.75x0.6 smd: 1(-0.525,-0.4) 2(0.525,-0.4) 3(0.525,0.4) 4(-0.525,0.4)
  silkscreen extent -1.22,-0.99 1.09,0.89, body extent -0.8,-0.6 0.8,0.6, height 0.35
OSC-SMD_4P-L3.2-W2.5-BL [mil]
  rect 55.1x47.2 smd: 1(-43.3,-34.5) 2(43.3,-34.5) 3(43.3,34.4) 4(-43.3,34.4)
  silkscreen extent -90,-75 82,68
"R 0603_L" [mil] "1/10W贴片电阻                 淘宝ID:黄晶宝石"
  rect 30x30 smd: 1(-25.59,0) 2(25.59,0)
  silkscreen extent -51,-26 51,26, body extent -31,-16 32,16, height 16
SN74AXC2T245 [mm]
  rrect50% 0.7x0.2 smd mask+0.05: 1(-0.575,0.2)
  rrect50% 0.6x0.2 smd mask+0.05: 2(-0.625,-0.2) 6(0.625,-0.2) 7(0.625,0.2)
  rrect50% 0.2x0.6 smd mask+0.05: 3(-0.375,-0.8) 4(0.025,-0.8) 5(0.425,-0.8) 8(0.425,0.8) 9(0.025,0.8) 10(-0.375,0.8)
  silkscreen extent -0.97,0.48 -0.82,0.62
TPD1E05U06 [mm] "TPD1E05U06"
  rect 0.3x0.5 smd: 1(-0.35,0) 2(0.35,0)
  silkscreen extent -0.7,-0.3 -0.7,0.3
TPD4E05U06DQAR [mm] "TVS 5V ESD"
  rrect50% 0.2x0.565 smd mask+0.07: 1(-1,-0.417) 2(-0.5,-0.417) 4(0.5,-0.417) 5(1,-0.417) 6(1,0.417) 7(0.5,0.417) 9(-0.5,0.417) 10(-1,0.417)
  rrect25% 0.4x0.565 smd paste-0.02: 3(0,-0.417) 8(0,0.417)
  silkscreen extent -1.07,-1.19 -0.93,-1.04
TSSOP-48_L12.6-W6.2-P0.50-LS8.1-BL [mil]
  oval 11x67.5 smd: 1(-226.4,-146) 2(-206.7,-146) 3(-187,-146) 4(-167.3,-146) 5(-147.6,-146) 6(-127.9,-146) 7(-108.3,-146) 8(-88.6,-146) 9(-68.9,-146) 10(-49.2,-146) 11(-29.5,-146) 12(-9.8,-146) 13(9.8,-146) 14(29.5,-146) 15(49.2,-146) 16(68.9,-146) 17(88.6,-146) 18(108.3,-146) 19(128,-146) 20(147.6,-146) 21(167.3,-146) 22(187,-146) 23(206.7,-146) 24(226.4,-146) 25(226.4,146) 26(206.7,146) 27(187,146) 28(167.3,146) 29(147.6,146) 30(128,146) 31(108.3,146) 32(88.6,146) 33(68.9,146) 34(49.2,146) 35(29.5,146) 36(9.8,146) 37(-9.8,146) 38(-29.5,146) 39(-49.2,146) 40(-68.9,146) 41(-88.6,146) 42(-108.3,146) 43(-127.9,146) 44(-147.6,146) 45(-167.3,146) 46(-187,146) 47(-206.7,146) 48(-226.4,146)
  silkscreen extent -256,-152 249,103
WSON-6_L2.0-W2.0-P0.65-TL-EP [mil]
  oval 23.9x14.3 smd: 1(-40.5,25.6) 2(-40.5,0) 3(-40.5,-25.6) 4(40.5,-25.6) 5(40.5,0) 6(40.5,25.6)
  rect 39.4x63 smd: 7(0,0)
  silkscreen extent -67,-42 42,42
X2SON-8_L1.4-W1.0-P0.35-BL [mil]
  rect 6.9x23.6 smd: 1(-20.7,-17.5)
  rect 6.9x20.9 smd: 2(-6.9,-18.9) 3(6.9,-18.9) 4(20.7,-18.9) 5(20.7,18.9) 6(6.9,18.9) 7(-6.9,18.9) 8(-20.7,18.9)
  silkscreen extent -32,-40 32,20

## Part data
C1 C2 C3 C4 C5 C6 C7 C8 C9 C10 C11 C12 C13 C14 C15 C16 C17 C18 C19 C20 C21 C22 C23 C24 C25 C26 C27 C28 C29 C30 C31 C32 C33 C34 C35 C36 C37 C38 C39 C40 C41 C42 C43 C44 C45 C46 C47 C48 C49 C50 C51 C52 C53 C54 C55 C56 C57 C58 C59 C60 C61 C62 C63 C64 C65 C66 C67 C68 C69: library part C, "贴片电容", BOM名称=无极性贴片电容, 淘宝ID="封装库来自淘宝 ID：黄晶宝石", 联系售后=https://shop463601444.taobao.com
CN1: "PIN总数:120P;间距:0.8mm;安装方式:立贴;排数:2;额定电流:500mA;工作温度:-45℃~+80℃;", Current Rating=500mA, JLCPCB Part Class="Extended Part", LCSC Part Name="AMP宏致同款BTB板对板PH0.8-2*60P/120PIN母座 合高5.0MM", Manufacturer=LX(连欣科技), ManufacturerPart=XDB612-120P-COR, Operating Temperature=-45℃~+80℃, AddInBom=yes, Contact Material=铜, Contact Plating=金, ConvertToPcb=yes, Datasheet=https://item.szlcsc.com/datasheet/XDB612-120P-COR/8623463.html, FootprintName=CONN-SMD_120P-P0.80_THD0812F-120BV-GF, ModelId=534587499f204ed784a0d3d633a8bbcf, ModelName=CONN-SMD_120P-P0.80_THD0812F-120BV-GF, ModelTransform=2118.10616,236.22,0,0,0,0,0.002,0,-27.559, Mounting Type=立贴, Number of Pins=120P, Number of Rows=2, Pitch=0.8mm, Supplier=LCSC, Supplier Footprint=SMD,P=0.8mm, SupplierPart=C7527742, Symbol=XDB612-120P-COR
JP1 JP2: "9*2P接插件", BOM名称=9*2P接插件, 学习资源=www.ooocke.com, 版权归属=源创客
JP3: library part "Header 7", "7P接插件", BOM名称=7P接插件, 学习资源=https://shop463601444.taobao.com, 版权归属="封装库来自淘宝 ID：黄晶宝石"
L1: library part L, "小功率贴片电感", BOM名称=小功率贴片电感, 淘宝ID="封装库来自淘宝 ID：黄晶宝石", 联系售后=https://shop463601444.taobao.com
R1 R2 R3 R4 R5 R6 R7 R8 R9 R10 R11 R12 R14 R15 R16 R17 R18 R19 R20 R21 R22 R23 R24 R25 R26 R27 R28 R29 R30 R31 R32 R33: library part R, "贴片电阻", BOM名称=贴片电阻, 版权归属="来自淘宝 ID：黄晶宝石", 联系售后=https://shop463601444.taobao.com
R13: library part R, "贴片电阻1%", BOM名称=贴片电阻, 版权归属="来自淘宝 ID：黄晶宝石", 联系售后=https://shop463601444.taobao.com
U1 U2 U18 U19: "SN74AVC16T245 具有可配置电压转换和三态输出的 16 位双电源总线收发器", JLCPCB Part Class="Extended Part", LCSC Part Name=具备可配置电平转换/电压转换功能和三态输出的16位双电源总线收发器, Manufacturer=TI(德州仪器), ManufacturerPart=SN74AVC16T245DGGR, AddInBom=yes, ConvertToPcb=yes, Datasheet=https://www.ti.com/cn/lit/gpn/sn74avc16t245, FootprintName=TSSOP-48_L12.6-W6.2-P0.50-LS8.1-BL, ModelId=3630bc8bc65c4ae4913ce685d85b0283, ModelName=TSSOP-48_L12.6-W6.1-H1.0-LS8.1-P0.50, ModelTransform=318.898,496.063,0,90,0,0,0,0.0045,0, Supplier=LCSC, Supplier Footprint=TSSOP-48-6.2mm, SupplierPart=C148481, Symbol=SN74AVC16T245DGGR
U3 U21 U23: "数据速率:-;工作电压(VCCA):-;工作电压(VCCB):-;元件数:-;每个电路通道数:2;", JLCPCB Part Class="Extended Part", LCSC Part Name=双路双向I²C总线和SMBus电压电平转换器, Manufacturer=TI(德州仪器), ManufacturerPart=PCA9306DQER, Operating Temperature=-40℃~+85℃, Voltage - Supply(VCCA)=-, AddInBom=yes, Channel Type=双向, ConvertToPcb=yes, Data Rate=-, Datasheet=https://www.ti.com/cn/lit/gpn/pca9306, Features=-, FootprintName=X2SON-8_L1.4-W1.0-P0.35-BL, Input Signal=-, ModelId=ca9e004a924f4dd0ba6981db82d16128, ModelName=X2SON-8_L1.4-W1.0-H0.4-P0.35-BL, ModelTransform=55.118,40.05354,0,180,0,0,0.003,0.603,0, Number of Circuits=2, Number of Elements=-, Output Signal=-, Output Type=开漏, Supplier=LCSC, Supplier Footprint=X2-SON-8(0.8x1.4), SupplierPart=C440032, Symbol=PCA9306DQER, Voltage - Supply(VCCB)=-
U4: "ADV7611提供汽车级、专业级(无HDCP)和工业级三种版本，工作温度范围为 -40 °C 至 +85 °C。是一款高质量、单输入HDMI接收器，内置HDMI兼容型接收器，支持HDMI 1.4a规定的所有强制性3D电视格式，和最高UXGA 60 Hz、8位的分辨率。它集成一个CEC控制器，支持CDC特性。具有一个音频输出端口，用于输出从HDMI流提取的音频数据。HDMI接收器具有高级静音控制器，可消除音频输出中的外来声频噪声。支持来自I2S串行器的音频流(两个音频通道)、来自S/PDIF串行器的音频流(", JLCPCB Part Class="Extended Part", LCSC Part Name="低功耗165 MHz HDMI接收器", Manufacturer=ADI(亚德诺), ManufacturerPart=ADV7611BSWZ-RL, AddInBom=yes, ConvertToPcb=yes, Datasheet=https://item.szlcsc.com/datasheet/ADV7611BSWZ-RL/743801.html, FootprintName=LQFP-64_L10.0-W10.0-P0.50-LS12.0-TL-EP5.3, ModelId=cd9de06618c44fcf82654c43a457f83c, ModelName=LQFP-64_L10.0-W10.0-H1.4-LS12.0-P0.50, ModelTransform=472.441,472.441,0,270,0,0,0,0,0, Supplier=LCSC, Supplier Footprint=LQFP-64(10x10), SupplierPart=C706706, Symbol=ADV7611BSWZ-RL
U5: "接口类型:I2S；I2C;数据速率:-;", JLCPCB Part Class="Extended Part", LCSC Part Name="225 MHz, 高性能HDMI发射器带ARC", Manufacturer=ADI(亚德诺), ManufacturerPart=ADV7511KSTZ, Operating Temperature=0℃~+70℃, Quiescent Supply Current=-, Voltage - Supply=1.8V~3.3V, AddInBom=yes, ConvertToPcb=yes, Data Rate=-, Datasheet=https://item.szlcsc.com/datasheet/ADV7511KSTZ/190853.html, Features=中断生成, FootprintName=LQFP-100_L14.0-W14.0-P0.50-LS16.0-BL, Interface=I2S；I2C, ModelId=469e6cc70557486dbd01fd12ff814964, ModelName=LQFP-100_L14.0-W14.0-H1.4-LS16.0-P0.50, ModelTransform=629.92,629.92,0,0,0,0,0,0,0, Supplier=LCSC, Supplier Footprint=LQFP-100(14x14), SupplierPart=C179459, Supply Current=-, Symbol=ADV7511KSTZ
U6 U7 U8 U12 U13 U14: "TVS 5V ESD"
U9 U15: "单通道ESD"
U10 U16: "肖特基二极管"
U17: "功能类型:升压型;工作电压:700mV~5.5V;输出电压:1.8V~5.5V;输出电流:-;输出类型:可调;", Frequency - Switching=-, JLCPCB Part Class="Extended Part", LCSC Part Name="升压型 700mV~5.5V", Manufacturer=TI(德州仪器), ManufacturerPart=TPS61099DRVR, Operating Temperature=-40℃~+150℃@(TJ), Output Voltage=1.8V~5.5V, Quiescent Current=1uA, Voltage - Supply=700mV~5.5V, AddInBom=yes, ConvertToPcb=yes, Datasheet=https://www.ti.com/cn/lit/gpn/tps61099, Features=轻载高效模式；逐波限流；过流保护；负载断开, FootprintName=WSON-6_L2.0-W2.0-P0.65-TL-EP, Function=升压型, ModelId=521c6d8f59ad4736925338f4a59f8ef4, ModelName=WSON-6_L2.0-W2.0-H0.8-P0.65, ModelTransform=79.527,78.74,0,0,0,0,0,0,0, Number of Outputs=1, Output Current=-, Output Type=可调, Supplier=LCSC, Supplier Footprint=WSON-6-EP(2x2), SupplierPart=C2842395, Switch tube (built-in/external)=内置, Symbol=TPS61099DRVR, Synchronous Rectifier=是, Topology=升压式
USB1 USB3: "19PIN A型前插后贴HDMI插座 铜壳", Current Rating=-, JLCPCB Part Class="Extended Part", LCSC Part Name="HDMI-A 母 19P", Manufacturer=XUNPU(讯普), ManufacturerPart=HDMI-001S, AddInBom=yes, Connector Type=HDMI-A, ConvertToPcb=yes, Datasheet=https://item.szlcsc.com/datasheet/HDMI-001S/763623.html, FootprintName=HDMI-SMD_HDMI-001S, Gender=母, ModelId=95350f9f774e4f059b8c605506db97f9, ModelName=HDMI-SMD_HDMI-001S, ModelTransform=590.5878,468.503,0,0,0,0,0,-79.567,-85.039, Mounting Type=卧贴, Number of Pins=19P, Operating Temperature=-, Supplier=LCSC, Supplier Footprint=SMD, SupplierPart=C720616, Symbol=HDMI-001S, Voltage Rating=-
X1: library part XTAL-4P, "4脚无源晶振", BOM名称=4脚无源晶振, 学习资源=www.ooocke.com, 版权归属=源创客
X2: "频率:12MHz;常温频差:±10ppm;输出模式:CMOS;工作电压:1.8V~3.3V;频率稳定度:±20ppm;", Frequency Stability=±20ppm, JLCPCB Part Class="Extended Part", LCSC Part Name="YSO110TR 12MHZ 1.8V-3.3V ±10PPM -40~85℃ (±20PPM) CMOS", Manufacturer=YXC(扬兴晶振), ManufacturerPart=OT322512MJBA4SL, Normal temperature Frequency Tolerance=±10ppm, Operating Temperature=-40℃~+85℃, Voltage - Supply=1.8V~3.3V, AddInBom=yes, ConvertToPcb=yes, Datasheet=https://item.szlcsc.com/datasheet/OT322512MJBA4SL/772573.html, FootprintName=OSC-SMD_4P-L3.2-W2.5-BL, ModelId=ae22b8d143894765bc8100c37cb6356f, ModelName=OSC-SMD_4P-L3.2-W2.5-H1.0, ModelTransform=125.984,98.425,0,0,0,0,0,0,0, Output Type=CMOS, Supplier=LCSC, Supplier Footprint=SMD3225-4P, SupplierPart=C725989, Symbol=OT322512MJBA4SL

## Via types
v1: diameter 0.5, hole 0.3, Top Layer to Bottom Layer, tented top, 493 vias
v2: diameter 0.5, hole 0.3, Top Layer to Bottom Layer, 46 vias

## Nets (pads, with @x,y where several pads share a name; then routed paths per layer and width w, separated by ;. In a path a pad name is that pad's centre, name@x,y a point inside that pad or via, vN(x,y) a via of type N, cw(c..) or ccw(c..) an arc to the next point about the centre after c; other vN are vias at no path point)
1V8: C6.1 C8.1 C9.2 C12.1 C14.1 C15.2 C16.2 C17.1 C18.1 C19.1 C20.2 C21.1 C22.2 C23.1 C24.1 C25.1 C26.1 C31.1 C32.1 C34.2 C36.1 C38.1 C40.1 C41.2 C44.2 C45.1 C46.1 C54.1 C56.1 C61.1 C63.1 C65.1 C68.1 CN1.57 CN1.58 JP3.3 R3.2 R5.2 R18.1 R19.2 R21.2 R26.1 R28.1 R31.1 R33.1 U1.31 U1.42 U2.31 U2.42 U3.2 U4.2 U4.14 U4.24 U4.40 U4.52 U4.57 U4.60 U5.1 U5.19 U5.21 U5.24 U5.25 U5.26 U5.29 U5.34 U5.41 U5.49 U5.76 U5.77 U11.7 U11.10 U18.31 U18.42 U19.31 U19.42 U20.1 U20.7 U20.10 U21.2 U22.1 U22.7 U22.10 U23.2 X2.1 X2.4 | length 154.6
  Top Layer w0.254: U23.2@6.223,8.48 6.232,8.48 6.232,8.849 6.381,8.998 6.731,8.998 6.877,9.144 v1(7.366,9.144) ; U5.21@23.999,37.805 23.999,36.673 24.172,36.5 24.233,36.5 24.46,36.274 v1(24.526,36.274) 24.992,36.739 24.992,37.797 U5.19@25,37.805 ; U20.1@25.206,11.376 U20.7@26.406,11.376 27.109,11.376 C65.1@27.544,11.811 ; v1(59.055,24.13) C8.1@60.056,24.13 ; C14.1@60.183,39.497 60.31,39.624 60.31,40.304 60.579,40.573 v1(60.579,40.64) ; v1(71.496,25.903) 71.562,25.903 71.885,25.581 72.376,25.581 72.75,25.207 U4.52@72.75,24.455 ; U1.42@73.322,47.269 73.322,46.058 v1(73.66,45.72) ; v1(73.66,34.29) 73.66,34.35 74.108,34.798 74.728,34.798 75.251,35.322 U4.24@75.251,36.055 ; U21.2@76.502,8.48 76.502,12.428 76.835,12.76 v1(76.835,12.827) 76.835,12.894 76.723,13.005 R26.1@76.723,16.129 ; U4.60@76.75,24.455 76.75,26.01 76.962,26.222 v1(76.962,26.289) ; v1(77.978,27.178) 78.045,27.178 78.217,27.005 U4.2@80.178,27.005 ; U1.31@78.829,47.253 78.829,46.03 79.092,45.767 79.201,45.767 v1(79.248,45.72) ; v1(79.121,34.036) 79.168,33.989 79.168,33.481 79.642,33.007 80.799,33.007 U4.14@80.801,33.005 ; v1(84.201,13.97) 84.244,14.013 84.244,15.704 U19.42@84.249,15.708 ; U3.2@84.503,40.612 84.512,40.621 84.512,40.981 84.661,41.13 86.06,41.13 86.239,40.951 U11.10@86.239,40.805 ; R5.2@85.105,44.267 85.551,43.821 85.551,43.735 v1(85.598,43.688) 85.598,43.068 R3.2@85.74,42.926 ; U11.7@87.239,40.205 87.366,40.205 87.393,40.232 87.393,41.298 88.392,42.297 C9.2@88.392,44.293 87.931,43.832 87.931,43.481 v1(87.884,43.434) ; U19.31@89.751,15.708 89.756,15.704 89.756,14.257 v1(89.789,14.224) ; U22.1@94.192,11.449 U22.7@95.392,11.449 95.762,11.449 C68.1@96.886,12.573
  Top Layer w0.305: v1(31.623,36.195) 33.146,36.195 33.997,37.046 33.997,37.803 U5.1@33.999,37.805 ; U5.76@35.549,24.255 35.551,24.252 36.439,24.252 C22.2@37.196,23.495 ; U5.77@35.549,24.755 36.952,24.755 C20.2@37.196,24.511 ; U4.57@75.251,24.455 75.279,24.483 75.279,25.253 76.278,26.252 76.925,26.252 v1(76.962,26.289)
  Top Layer w0.406: v1@7.239,9.296 R33.1@7.239,11.288 ; v1(7.366,9.144) 7.384,9.162 7.384,9.895 8.15,10.661 8.15,10.666 R31.1@8.645,10.666 ; v1(15.24,13.97) 15.245,13.975 15.245,15.704 U18.42@15.249,15.708 ; U5.41@19.812,28.755 U5.41@20.449,28.755 21.354,28.755 21.789,28.321 v1(21.814,28.321) ; U5.34@19.812,32.256 22.197,32.256 22.566,32.624 v1(22.591,32.624) 22.591,33.518 ; U5.29@19.812,34.755 U5.29@20.449,34.755 21.354,34.755 22.591,33.518 ; U5.49@20.449,24.755 20.451,24.752 22.731,24.752 v1(22.733,24.75) ; v1(20.701,13.97) 20.701,13.995 20.751,14.045 U18.31@20.751,15.708 ; 21.173,37.356 21.829,36.7 ; v1(21.829,36.274) 21.829,36.7 ; v1(22.606,20.447) 22.624,20.429 22.624,20.16 R21.2@23.749,19.035 ; v1(26.924,11.684) 26.942,11.702 27.435,11.702 C65.1@27.544,11.811 ; JP3.3@47.46,2.73 47.46,11.875 47.498,11.913 v1(47.498,11.938) ; U2.42@58.141,29.126 58.169,29.098 59.053,29.098 60.056,28.095 C8.1@60.056,24.13 ; U2.31@58.141,34.628 58.171,34.658 59.053,34.658 60.183,35.788 C14.1@60.183,39.497 ; U4.40@68.58,30.505 70.46,30.505 v1(70.866,30.099) ; v1(96.266,12.7) 96.274,12.692 96.767,12.692 C68.1@96.886,12.573 ; 21.829,36.7 22.136,36.7 22.53,36.306 22.53,36.129 22.591,36.068 22.591,33.518
  Top Layer w0.508: C32.1@14.59,20.955 14.267,21.278 X2.1@14.267,22.492 X2.4@14.267,24.242 14.368,24.242 14.713,24.587 14.713,24.688 15.072,25.047 15.072,25.105 15.494,25.527 16.876,25.527 R18.1@17.638,26.289
  Top Layer w0.762: R21.2@23.749,19.035 R19.2@24.892,19.035
  Bottom Layer w0.254: C40.1@70.851,26.543 71.491,25.903 v1(71.496,25.903) ; C12.1@79.233,44.577 C12.1@79.248,44.592 ; v1(84.201,13.97) 84.201,12.969 C61.1@84.216,12.954 ; C63.1@89.774,12.954 89.789,12.969 v1(89.789,14.224)
  Bottom Layer w0.305: C24.1@24.511,29.21 C24.1@24.653,29.068 ; C46.1@70.851,29.337 70.858,29.345 70.858,30.091 v1(70.866,30.099) ; C45.1@70.851,30.734 70.858,30.727 70.858,30.107 v1(70.866,30.099) ; v1(73.66,34.29) 73.645,34.29 72.811,33.456 72.811,30.237 72.648,30.074 70.891,30.074 v1(70.866,30.099) ; C38.1@76.073,26.274 76.08,26.281 76.954,26.281 v1(76.962,26.289) 76.992,26.289 77.47,26.767 C36.1@77.5,26.767 77.534,26.767 77.945,27.178 v1(77.978,27.178) 77.978,27.231 78.018,27.271 78.018,27.711 C34.2@78.247,27.94 ; C41.2@78.755,33.02 79.121,33.386 v1(79.121,34.036)
  Bottom Layer w0.406: v1(15.24,13.97) 15.248,13.962 15.248,12.961 C54.1@15.255,12.954 ; C56.1@20.686,12.954 20.693,12.962 20.693,13.962 v1(20.701,13.97) ; v1(21.814,28.321) 21.839,28.321 22.007,28.154 22.286,28.154 22.291,28.149 C26.1@22.464,28.321 23.353,29.21 24.511,29.21 24.623,29.21 C24.1@24.765,29.068 C24.1@24.653,29.068 ; C31.1@22.464,25.4 22.642,25.222 22.642,24.867 22.733,24.775 v1(22.733,24.75) ; v1(22.591,32.624) 22.616,32.624 22.746,32.494 25.022,32.494 C25.1@25.146,32.37 ; v1(73.66,45.72) 73.66,44.592 C6.1@73.675,44.577 ; C12.1@79.248,44.592 v1(79.248,45.72)
  Bottom Layer w0.762: C23.1@22.591,31.75 v1(22.591,32.624) ; C21.1@22.591,33.401 v1(22.591,32.624) ; C18.1@23.812,36.131 22.347,36.131 21.59,35.374 21.59,34.537 21.44,34.388 21.44,33.551 22.367,32.624 v1(22.591,32.624)
  other v1: 14.267,21.676 35.179,23.622 15.113,25.146 51.181,54.102 51.181,55.245
3V3: C5.2 C7.2 C10.2 C11.2 C13.2 C29.1 C30.1 C35.2 C37.2 C39.2 C42.1 C43.2 C47.1 C48.1 C51.2 C52.1 C53.2 C55.1 C57.1 C58.1 C59.2 C60.1 C62.2 C66.1 C69.1 CN1.61 CN1.62 JP1.2 JP2.2 JP3.2 L1.1 R2.2 R4.1 R6.1 R9.2 R10.1 R11.2 R20.2 R24.2 R25.2 R27.2 R29.2 R30.2 R32.2 U1.7 U1.18 U2.7 U2.18 U4.5 U4.8 U4.11 U4.23 U4.34 U4.44 U5.47 U11.6 U17.4 U17.6 U18.7 U18.18 U19.7 U19.18 U20.6 U22.6 | length 142.4
  Top Layer w0.254: U20.6@26.406,10.976 26.433,10.949 26.882,10.949 C66.1@27.544,10.287 ; U1.7@73.322,39.853 73.322,40.937 v1(73.66,41.275) ; U4.23@75.754,35.432 75.754,34.929 75.819,34.865 v1(75.819,34.798) ; U1.18@78.824,39.853 78.824,40.847 79.248,41.272 v1(79.248,41.275) ; v1(84.201,9.652) 84.244,9.609 84.244,8.296 U19.7@84.249,8.292 ; U11.6@87.239,39.805 88.661,39.805 90.043,41.187 C10.2@90.043,41.212 ; U19.18@89.751,8.292 89.756,8.296 89.756,9.619 v1(89.789,9.652) ; U22.6@95.392,11.049 C69.1@96.886,11.049
  Top Layer w0.406: C53.2@2.032,3.668 2.97,2.73 JP1.2@4.84,2.73 ; R32.2@2.398,8.001 2.406,8.009 2.406,8.756 v1(2.413,8.763) 2.406,8.77 2.406,9.518 R30.2@2.398,9.525 ; U17.4@5.982,53.313 6.504,53.313 6.858,52.959 ; R29.2@10.175,9.525 v1(11.176,9.525) ; v1(15.245,9.647) 15.245,8.296 U18.7@15.249,8.292 ; U5.47@19.812,25.776 21.298,25.776 21.796,26.274 v1(21.814,26.274) ; v1(20.701,9.779) 20.701,9.754 20.751,9.704 U18.18@20.751,8.292 ; C66.1@27.544,10.287 27.686,10.145 v1(27.686,9.398) ; U2.7@65.557,29.126 65.529,29.098 64.645,29.098 63.769,28.222 C7.2@63.769,24.13 65.461,24.13 67.315,22.276 68.9,22.276 R10.1@69.611,22.987 ; U2.18@65.557,34.628 65.527,34.658 64.645,34.658 63.769,35.535 C13.2@63.769,39.624 67.965,39.624 70.505,42.164 71.658,42.164 72.547,41.275 v1(73.66,41.275) ; U4.34@68.58,33.505 U4.34@69.201,33.505 70.561,33.505 70.908,33.852 70.908,33.926 71.501,34.519 v1(71.501,34.544) ; U4.44@69.749,28.504 v1(70.404,28.504) 70.404,28.479 70.477,28.405 70.477,22.994 R6.1@70.47,22.987 ; R24.2@79.644,9.398 80.974,9.398 81.863,10.287 83.514,10.287 84.149,9.652 v1(84.201,9.652) ; U4.5@80.801,28.504 80.756,28.55 79.914,28.55 79.629,28.835 v1(79.629,29.972) ; U4.8@80.801,30.005 80.785,29.989 79.646,29.989 v1(79.629,29.972) ; U4.11@80.801,31.504 80.758,31.461 79.914,31.461 79.629,31.175 v1(79.629,29.972) ; v1(89.916,43.815) 89.941,43.815 90.358,43.398 90.561,43.398 90.754,43.205 90.754,42.098 C10.2@90.043,41.387 ; C69.1@96.886,11.049 96.893,11.041 96.893,9.787 v1(96.901,9.779)
  Top Layer w0.762: U17.6@5.982,54.764 5.982,55.766 v1(6.604,56.388) 7.122,56.906 7.864,56.906 7.969,57.012 L1.1@9.144,57.012 ; R10.1@69.611,22.987 R6.1@70.47,22.987 R9.2@70.47,20.701 ; R25.2@70.485,3.414 R27.2@71.501,3.414 C59.2@72.517,3.414 73.201,2.73 JP2.2@74.84,2.73
  Bottom Layer w0.254: C5.2@73.66,42.403 C5.2@73.675,42.418
  Bottom Layer w0.406: C52.1@2.032,3.668 2.97,2.73 JP1.2@4.84,2.73 ; v1(3.683,25.908) R20.2@3.683,26.909 ; v1(15.245,9.647) 15.25,9.653 15.25,10.536 C55.1@15.255,10.541 ; v1(15.621,19.431) 17.872,21.682 22.571,21.682 24.13,23.241 24.13,24.433 24.765,25.068 C30.1@24.765,26.147 22.941,26.147 22.642,26.446 22.642,26.746 22.52,26.868 C29.1@22.464,26.868 ; C57.1@20.686,10.541 20.693,10.534 20.693,9.787 v1(20.701,9.779) ; v1(21.814,26.274) 21.832,26.292 21.888,26.292 22.286,26.691 22.286,26.746 C29.1@22.464,26.924 ; C58.1@72.517,3.414 73.201,2.73 JP2.2@74.84,2.73 ; v1(73.66,41.275) C5.2@73.66,42.403 ; C11.2@79.233,42.418 79.241,42.41 79.241,41.282 v1(79.248,41.275) ; v1(84.201,9.652) 84.209,9.66 84.209,10.533 C60.1@84.216,10.541 ; v1(89.789,9.652) 89.826,9.689 89.826,10.466 C62.2@89.901,10.541 ; v1(89.916,43.815) R2.2@89.916,44.943 ; v1(97.028,29.591) R11.2@97.028,30.465
  Bottom Layer w0.508: C42.1@70.851,27.94 70.404,28.387 v1(70.404,28.504) 70.383,28.504 70.001,28.886 70.001,31.281 C47.1@70.851,32.131 C48.1@70.851,33.528 71.389,34.066 71.389,34.432 v1(71.501,34.544) 71.501,34.642 71.926,35.067 74.295,35.067 C43.2@74.93,34.432 ; C43.2@75.057,34.178 75.057,34.432 75.423,34.798 v1(75.819,34.798)
  Bottom Layer w0.762: C35.2@78.755,28.956 79.629,29.83 v1(79.629,29.972) 79.375,30.226 C37.2@78.755,30.226 C39.2@78.755,31.623
  other v1: 8.001,51.689 8.001,52.451 49.657,53.975 49.657,55.245